# EAGLE board BikeLapse_Camera_Trigger_V3_PCB_v24 (EAGLE 9.7.0)
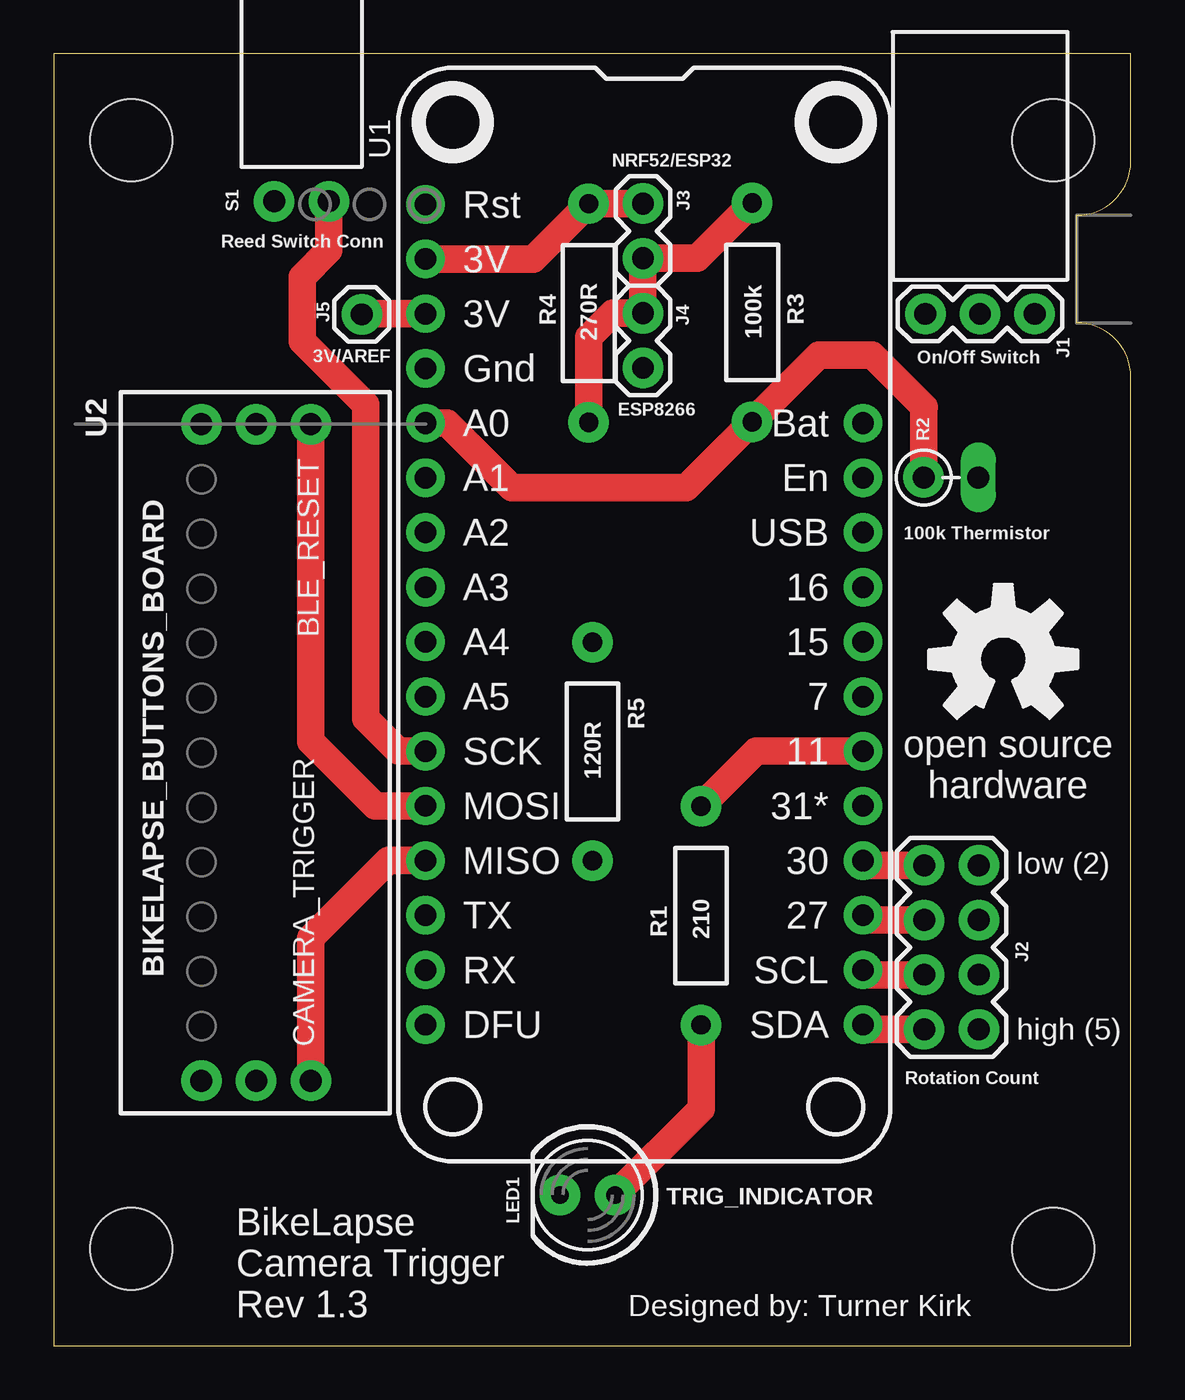
[diagram p0: board, top side]
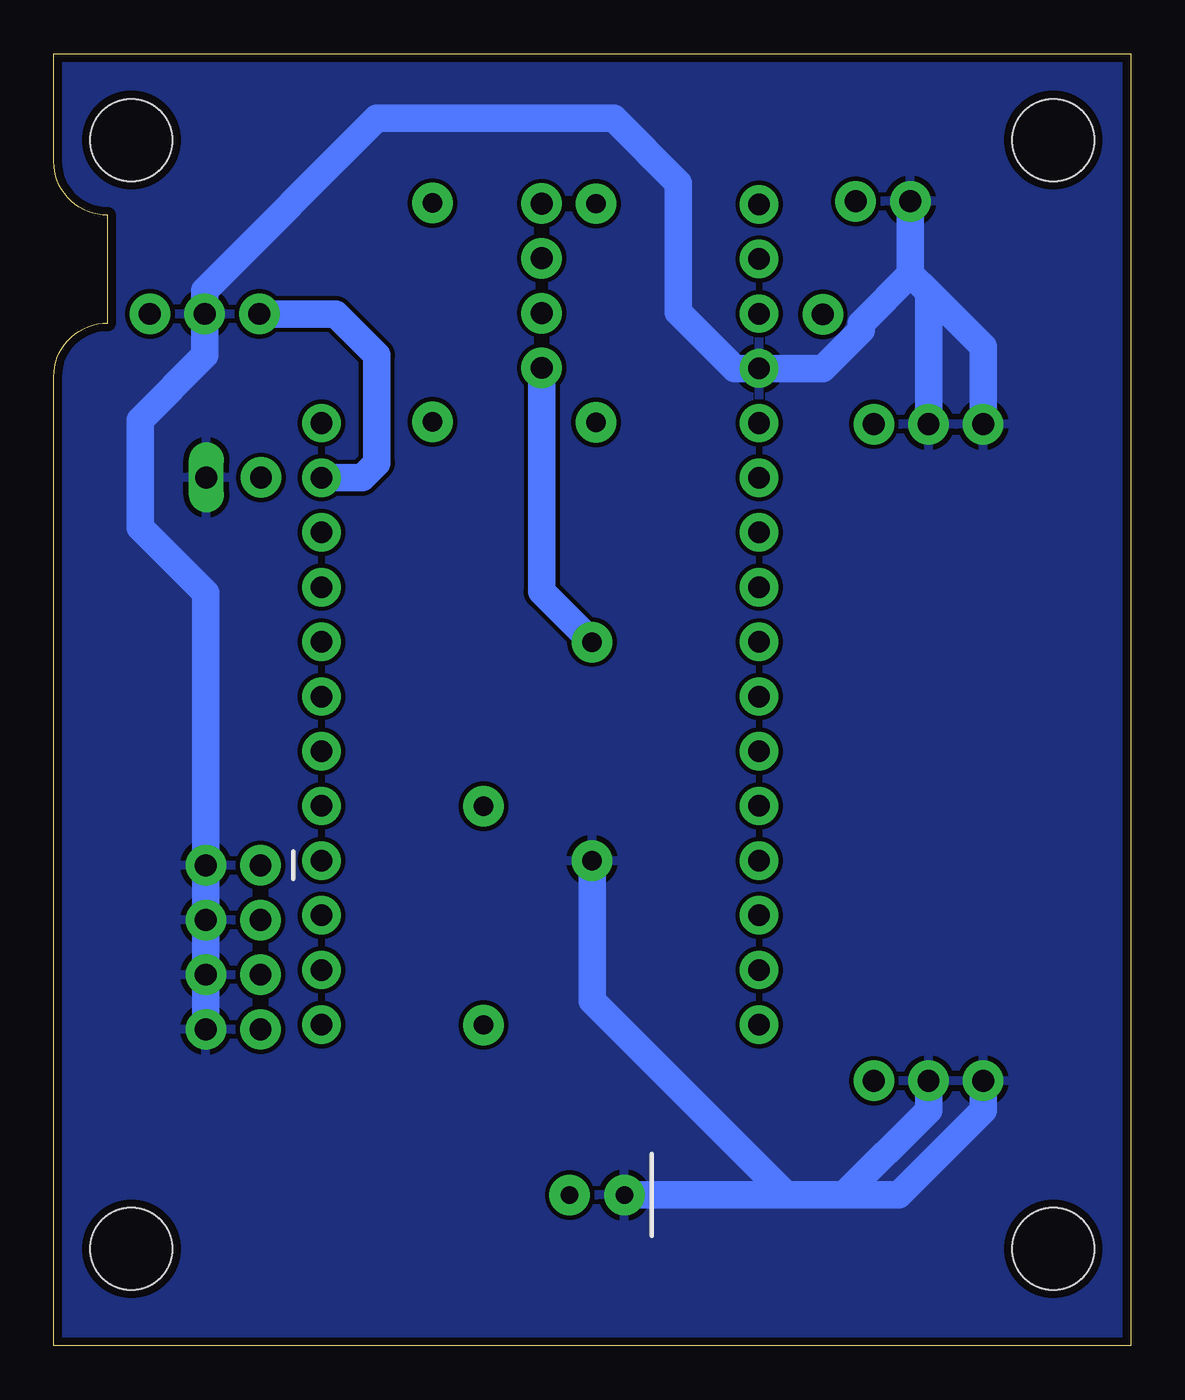
[diagram p1: board, bottom side, seen from below]

Size 50 x 60 mm. Coordinates in mm from the lower left corner, seen from the top.
Outline: 0,0 50,0 50,45 arc90 47.5,47.5 47.5,52.5 arc90 50,55 50,60 0,60 0,0
Copper layers (1*16): Top 0.035mm / dielectric 1.5mm / Bottom 0.035mm
Design rules "TKs_CustomDRU": minimum track width 10mil, minimum drill 20mil, track to track 8mil, track to pad 8mil, pad to pad 8mil, via to via 8mil, smd to smd 8mil, copper to edge 15mil, drill to drill 15mil, minimum pad ring 12mil, minimum via ring 10mil, stop-mask expansion 4mil, vias tented up to drill 20mil, thermal gap 10mil
Holes 3.8 mm at 3.6,4.5 46.4,4.5 46.4,56 3.6,56

## Footprints (pad centres in the part's own frame; a part is rotated, then mirrored left to right if it is on the bottom)
1X03_RA_PTH = drill 1.016 pad 1.88: 1 -2.54,0; 2 0,0; 3 2.54,0
2X4 = drill 1.016 pad 1.88: 1 -3.81,-1.27; 2 -3.81,1.27; 3 -1.27,-1.27; 4 -1.27,1.27; 5 1.27,-1.27; 6 1.27,1.27; 7 3.81,-1.27; 8 3.81,1.27
1X02 = drill 1.016 pad 1.88: 1 0,0; 2 2.54,0
1X01 = drill 1.016 pad 1.88: 1 0,0
LEDRD254W60D565H860B = drill 0.813 pad 1.88: A -1.27,0; K 1.27,0
SPARKFUN-RESISTORS_AXIAL-0.4 = drill 0.9 pad 1.88: P$1 -5.08,0; P$2 5.08,0
RS-2,5-SINGLE_PIN = drill 1.016 pad 1.88: 1 -1.27,0 | drill 1.016 long: 2 1.27,0
1X02_RA_PTH = drill 1.016 pad 1.88: 1 1.27,-5.85; 2 -1.27,-5.85
FEATHER-NRF52832 = drill 1 pad 1.778: 3V_1 8.89,1.27; 3V_2 11.43,1.27; 7 29.21,21.59; 11 31.75,21.59; 15 26.67,21.59; 16 24.13,21.59; 27 39.37,21.59; 30 36.83,21.59; 31 34.29,21.59; A0 16.51,1.27; A1 19.05,1.27; A2 21.59,1.27; A3 24.13,1.27; A4 26.67,1.27; A5 29.21,1.27; BAT 16.51,21.59; DFU 44.45,1.27; EN 19.05,21.59; GND 13.97,1.27; MISO 36.83,1.27; MOSI 34.29,1.27; RST 6.35,1.27; RX 41.91,1.27; SCK 31.75,1.27; SCL 41.91,21.59; SDA 44.45,21.59; TX 39.37,1.27; USB 21.59,21.59
BIKELAPSE_BUTTONS_BOARD = drill 1.016 pad 1.88: 6MM_BUTTON 8.83,32; 6MM_GND1 6.29,32; 6MM_GND2 3.75,32; 12MM_BUTTON 8.83,1.5; 12MM_GND1 6.29,1.5; 12MM_GND2 3.75,1.5

## Placement (x,y rotation side)
J1  On/Off Switch  [1X03_RA_PTH]  43,47.92 0 top
J2  Rotation Count  [2X4]  41.68,18.5 270 top
J3  NRF52/ESP32  [1X02]  27.35,50.5 90 top
J4  ESP8266  [1X02]  27.35,45.42 90 top
J5  3V/AREF  [1X01]  14.3,47.9 0 top
LED1  LED_5MMLED_5MM_2  [LEDRD254W60D565H860B]  24.78,7 180 top
LOGO1  OSHW-LOGOL  [OSHW-LOGO-L]  44.08,31.88 0 top
R1  210  [SPARKFUN-RESISTORS_AXIAL-0.4]  30.05,19.98 90 top
R2  100k Thermistor  [RS-2,5-SINGLE_PIN]  41.65,40.32 0 top
R3  100k  [SPARKFUN-RESISTORS_AXIAL-0.4]  32.43,47.99 270 top
R4  270R  [SPARKFUN-RESISTORS_AXIAL-0.4]  24.83,47.96 90 top
R5  120R  [SPARKFUN-RESISTORS_AXIAL-0.4]  25.01,27.6 90 top
S1  Reed Switch Conn  [1X02_RA_PTH]  11.5,59 0 top
U1  FEATHER-NRF52832  [FEATHER-NRF52832]  15.98,59.36 270 top
U2  BIKELAPSE_BUTTONS_BOARD  [BIKELAPSE_BUTTONS_BOARD]  3.1,10.8 0 top

## Library data of the parts
J1-J5 LED1 LOGO1 R1-R5 S1 U1 = Distance_Lapse_Camera_Trigger
U2 = Turners Ultimate ECAD Library

## Nets
3.3V: J3.2 R4.P$2 U1.3V_1
BLE-RESET: U1.MOSI U2.6MM_BUTTON
CAMERA_TRIGGER: U1.MISO U2.12MM_BUTTON
ENABLE: J1.1 U1.EN
GND: J1.2 J2.2 J2.4 J2.6 J2.8 LED1.K R2.2 R5.P$1 S1.2 U1.GND U2.6MM_GND1 U2.6MM_GND2 U2.12MM_GND1 U2.12MM_GND2
N$1: J2.3 U1.27
N$2: J2.1 U1.30
N$3: J2.5 U1.SCL
N$4: J2.7 U1.SDA
N$5: J5.1 U1.3V_2
N$6: J4.1 R5.P$2
N$7: J3.1 J4.2 R3.P$1 R4.P$1
N$11: LED1.A R1.P$1
THERMISTOR_IN: R2.1 R3.P$2 U1.A0
TRIG_INDICATOR_LED: R1.P$2 U1.11
V_BATT: U1.BAT
V_USB: U1.USB
WHEEL_TRIG: S1.1 U1.SCK

## Tracks (layer width: path | path; a pad name or v marks a point on that pad's centre or on a via)
3.3V
  Top 1.27: U1.3V_1 22.26,50.47 R4.P$2 J3.2
BLE-RESET
  Top 1.27: U1.MOSI 14.93,25.07 11.93,28.07 U2.6MM_BUTTON
CAMERA_TRIGGER
  Top 1.27: U1.MISO 15.53,22.53 11.93,18.93 U2.12MM_BUTTON
ENABLE
  Bottom 1.27: U1.EN 35.69,40.31 35,41 35,46 36.92,47.92 J1.1
GND
  Bottom 1.27: J2.8 J2.6 J2.4 J2.2 42.95,34.95 46,38 46,43 43,46 J1.2 43,49 35,57 24,57 21,54 21,48 18.39,45.39 U1.GND 14.3,45.39 12.52,47.16 12.52,47.48 10.23,49.77 | R5.P$1 25.01,16.01 19.74,10.74 19.16,10.16 16,7 | S1.2 10.23,49.77 | U2.6MM_GND1 9.39,48.93 | 9.39,48.93 10.23,49.77 | U2.6MM_GND2 6.85,46.39 9.39,48.93 | U2.12MM_GND1 9.39,10.93 13.32,7 | 13.32,7 15.24,7 16,7 | 16,7 LED1.K | U2.12MM_GND2 6.85,10.93 10.78,7 13.32,7
  pour Bottom: 0,0 50,0 50,60 0,60
N$1
  Top 1.27: J2.3 37.79,19.77 U1.27
N$2
  Top 1.27: J2.1 37.79,22.31 U1.30
N$3
  Top 1.27: J2.5 37.79,17.23 U1.SCL
N$4
  Top 1.27: J2.7 37.79,14.69 U1.SDA
N$5
  Top 1.27: J5.1 14.33,47.93 U1.3V_2
N$6
  Bottom 1.27: J4.1 27.35,35.02 R5.P$2
N$7
  Top 1.27: R3.P$1 29.86,50.51 J3.1 J4.2 25.95,47.95 24.83,46.83 R4.P$1
N$11
  Top 1.27: LED1.A 30.05,11 R1.P$1
THERMISTOR_IN
  Top 1.27: R2.1 40.38,43.57 40.41,43.59 38,46 35.52,46 R3.P$2 29.37,39.85 21.25,39.85 18.25,42.85 U1.A0
TRIG_INDICATOR_LED
  Top 1.27: U1.11 32.6,27.61 R1.P$2
WHEEL_TRIG
  Top 1.27: U1.SCK 15.98,27.61 14.47,29.12 14.47,43.7 11.52,46.65 11.52,49.64 12.77,50.88 S1.1

## Text on the board
tPlace: BLE_RESET | open source / hardware | low (2) | CAMERA_TRIGGER | high (5) | TRIG_INDICATOR | BikeLapse / Camera Trigger / Rev 1.3 | Designed by: Turner Kirk
Document: A B C D E F G H I J K L M N O | 1 / 2 / 3 / 4 / 5 / 6 / 7 / 8 / 9 / 10 / 11 / 12 / 13 / 14 / 15 / 16 / 17 / 18 / 19